# Allegro board Sport Sign_Indicator_PCB.brd
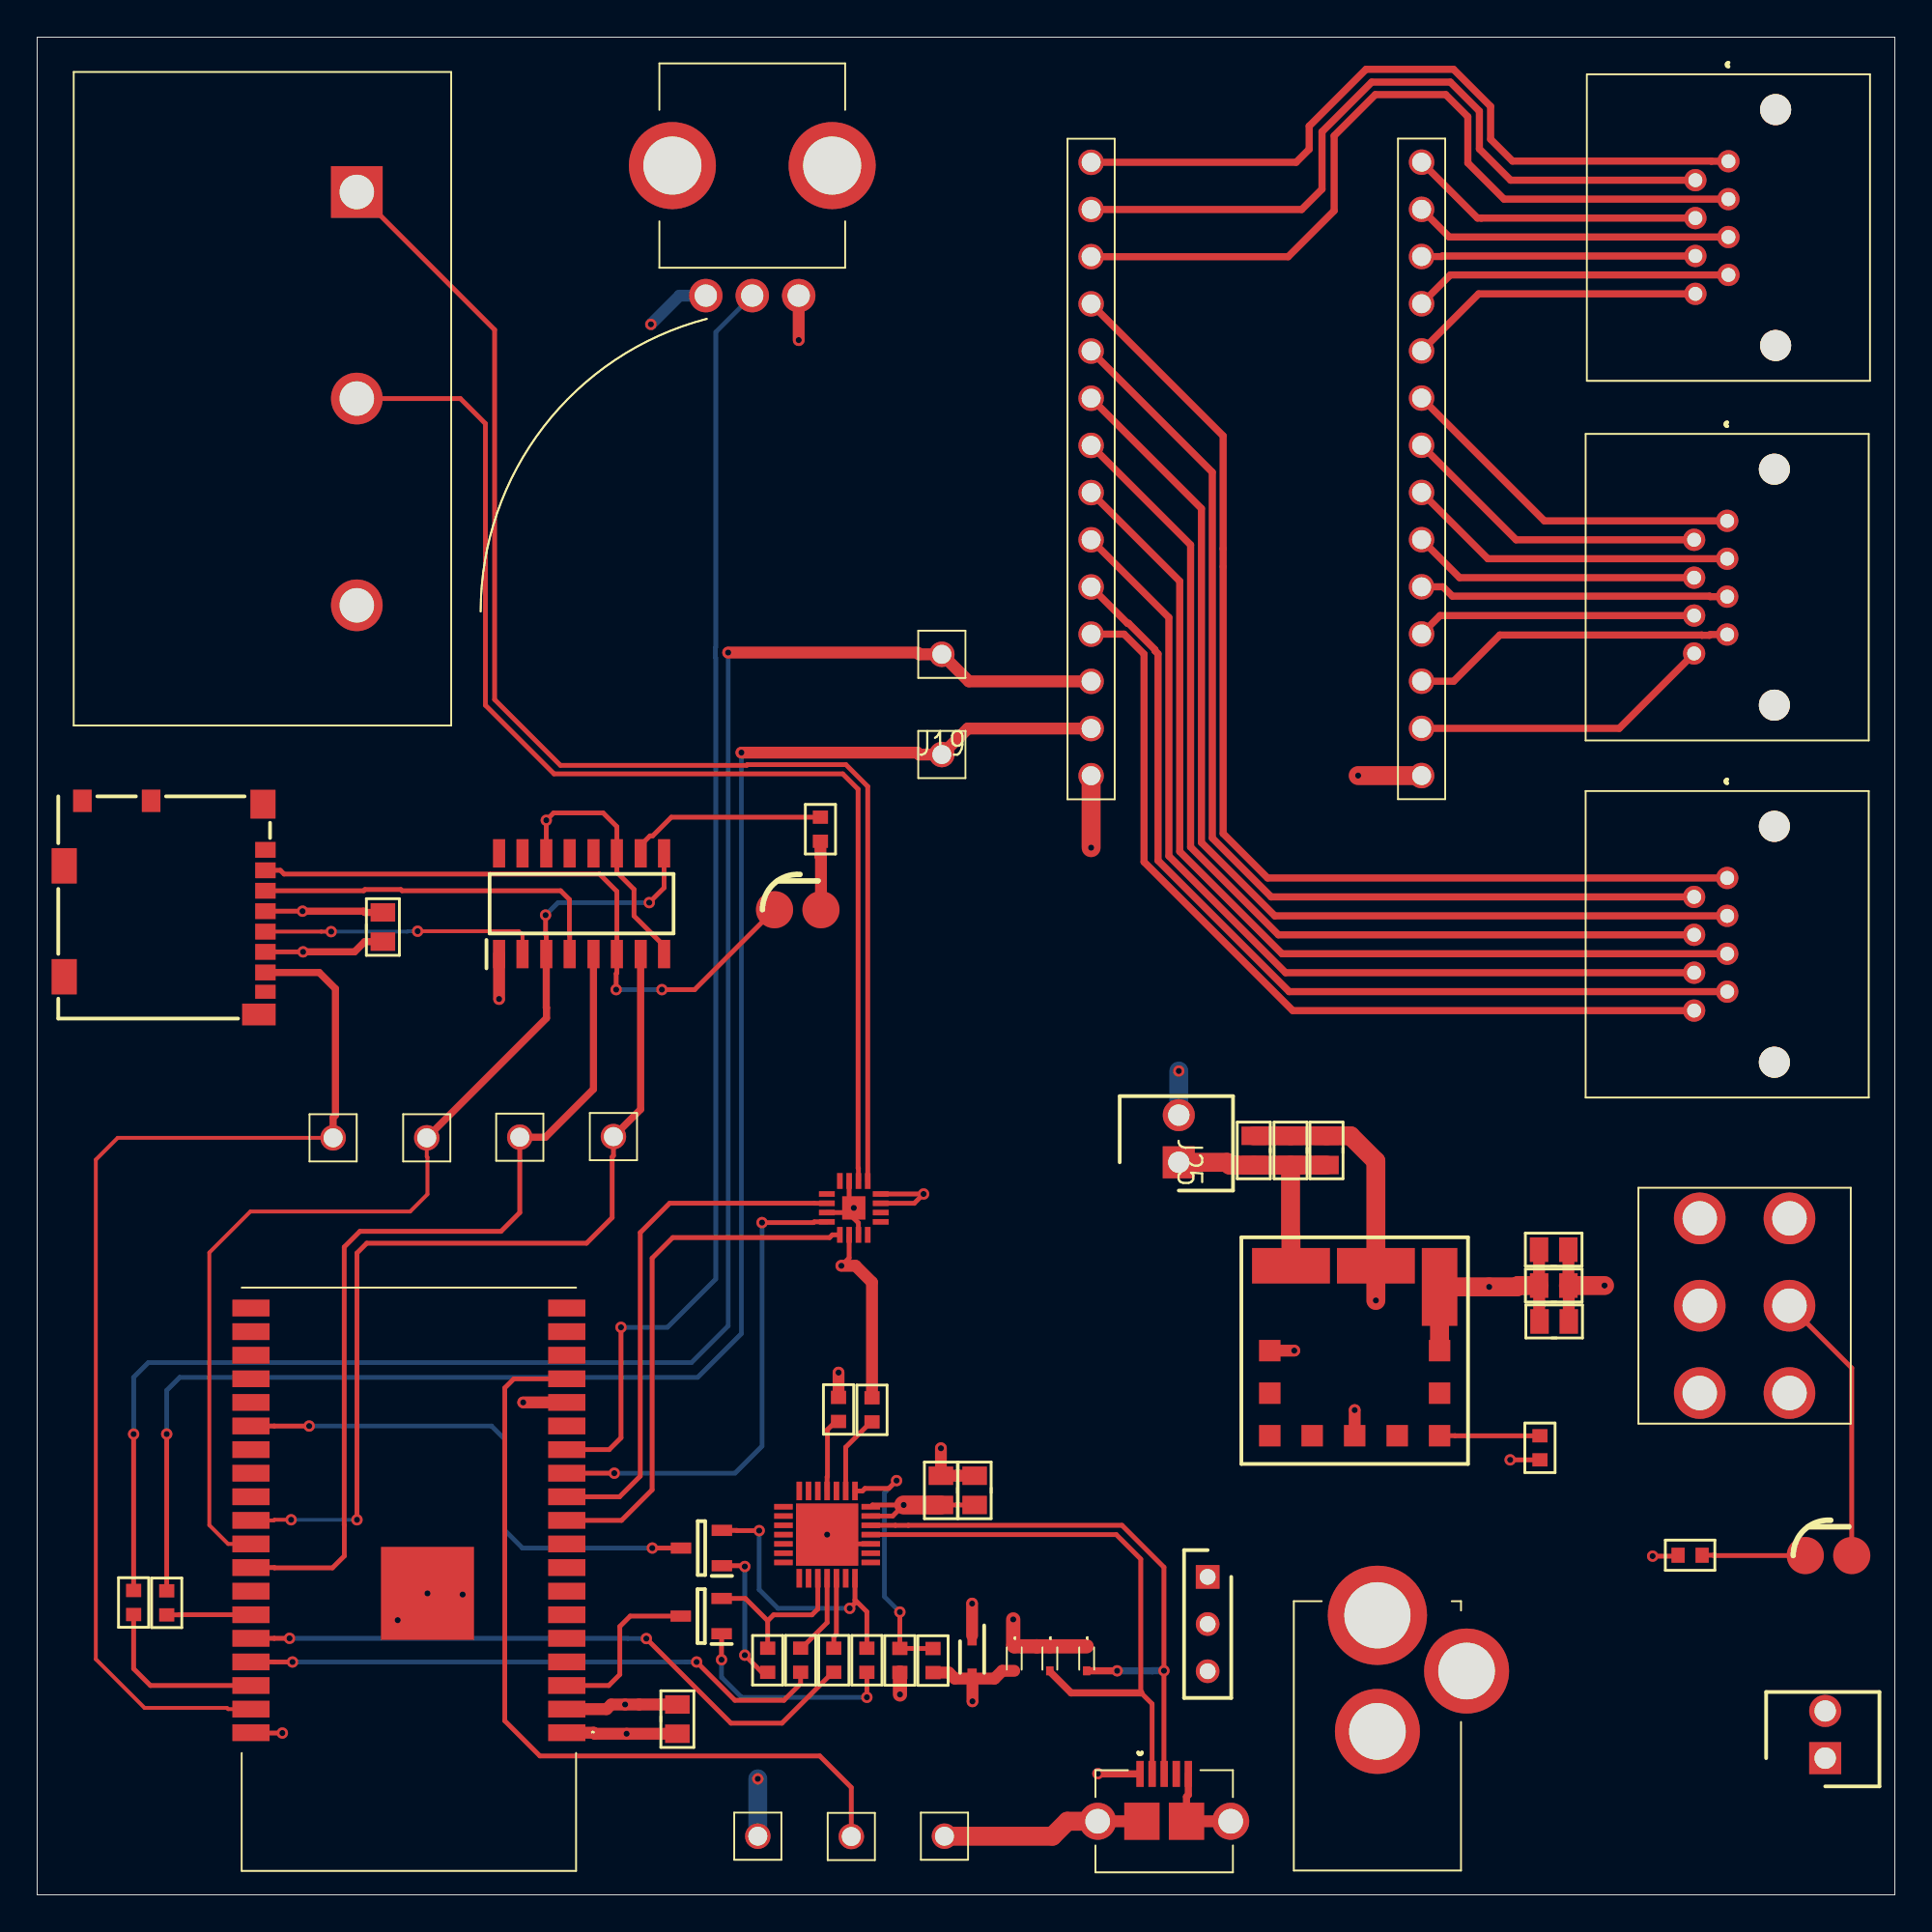
[diagram p0: board, top side]
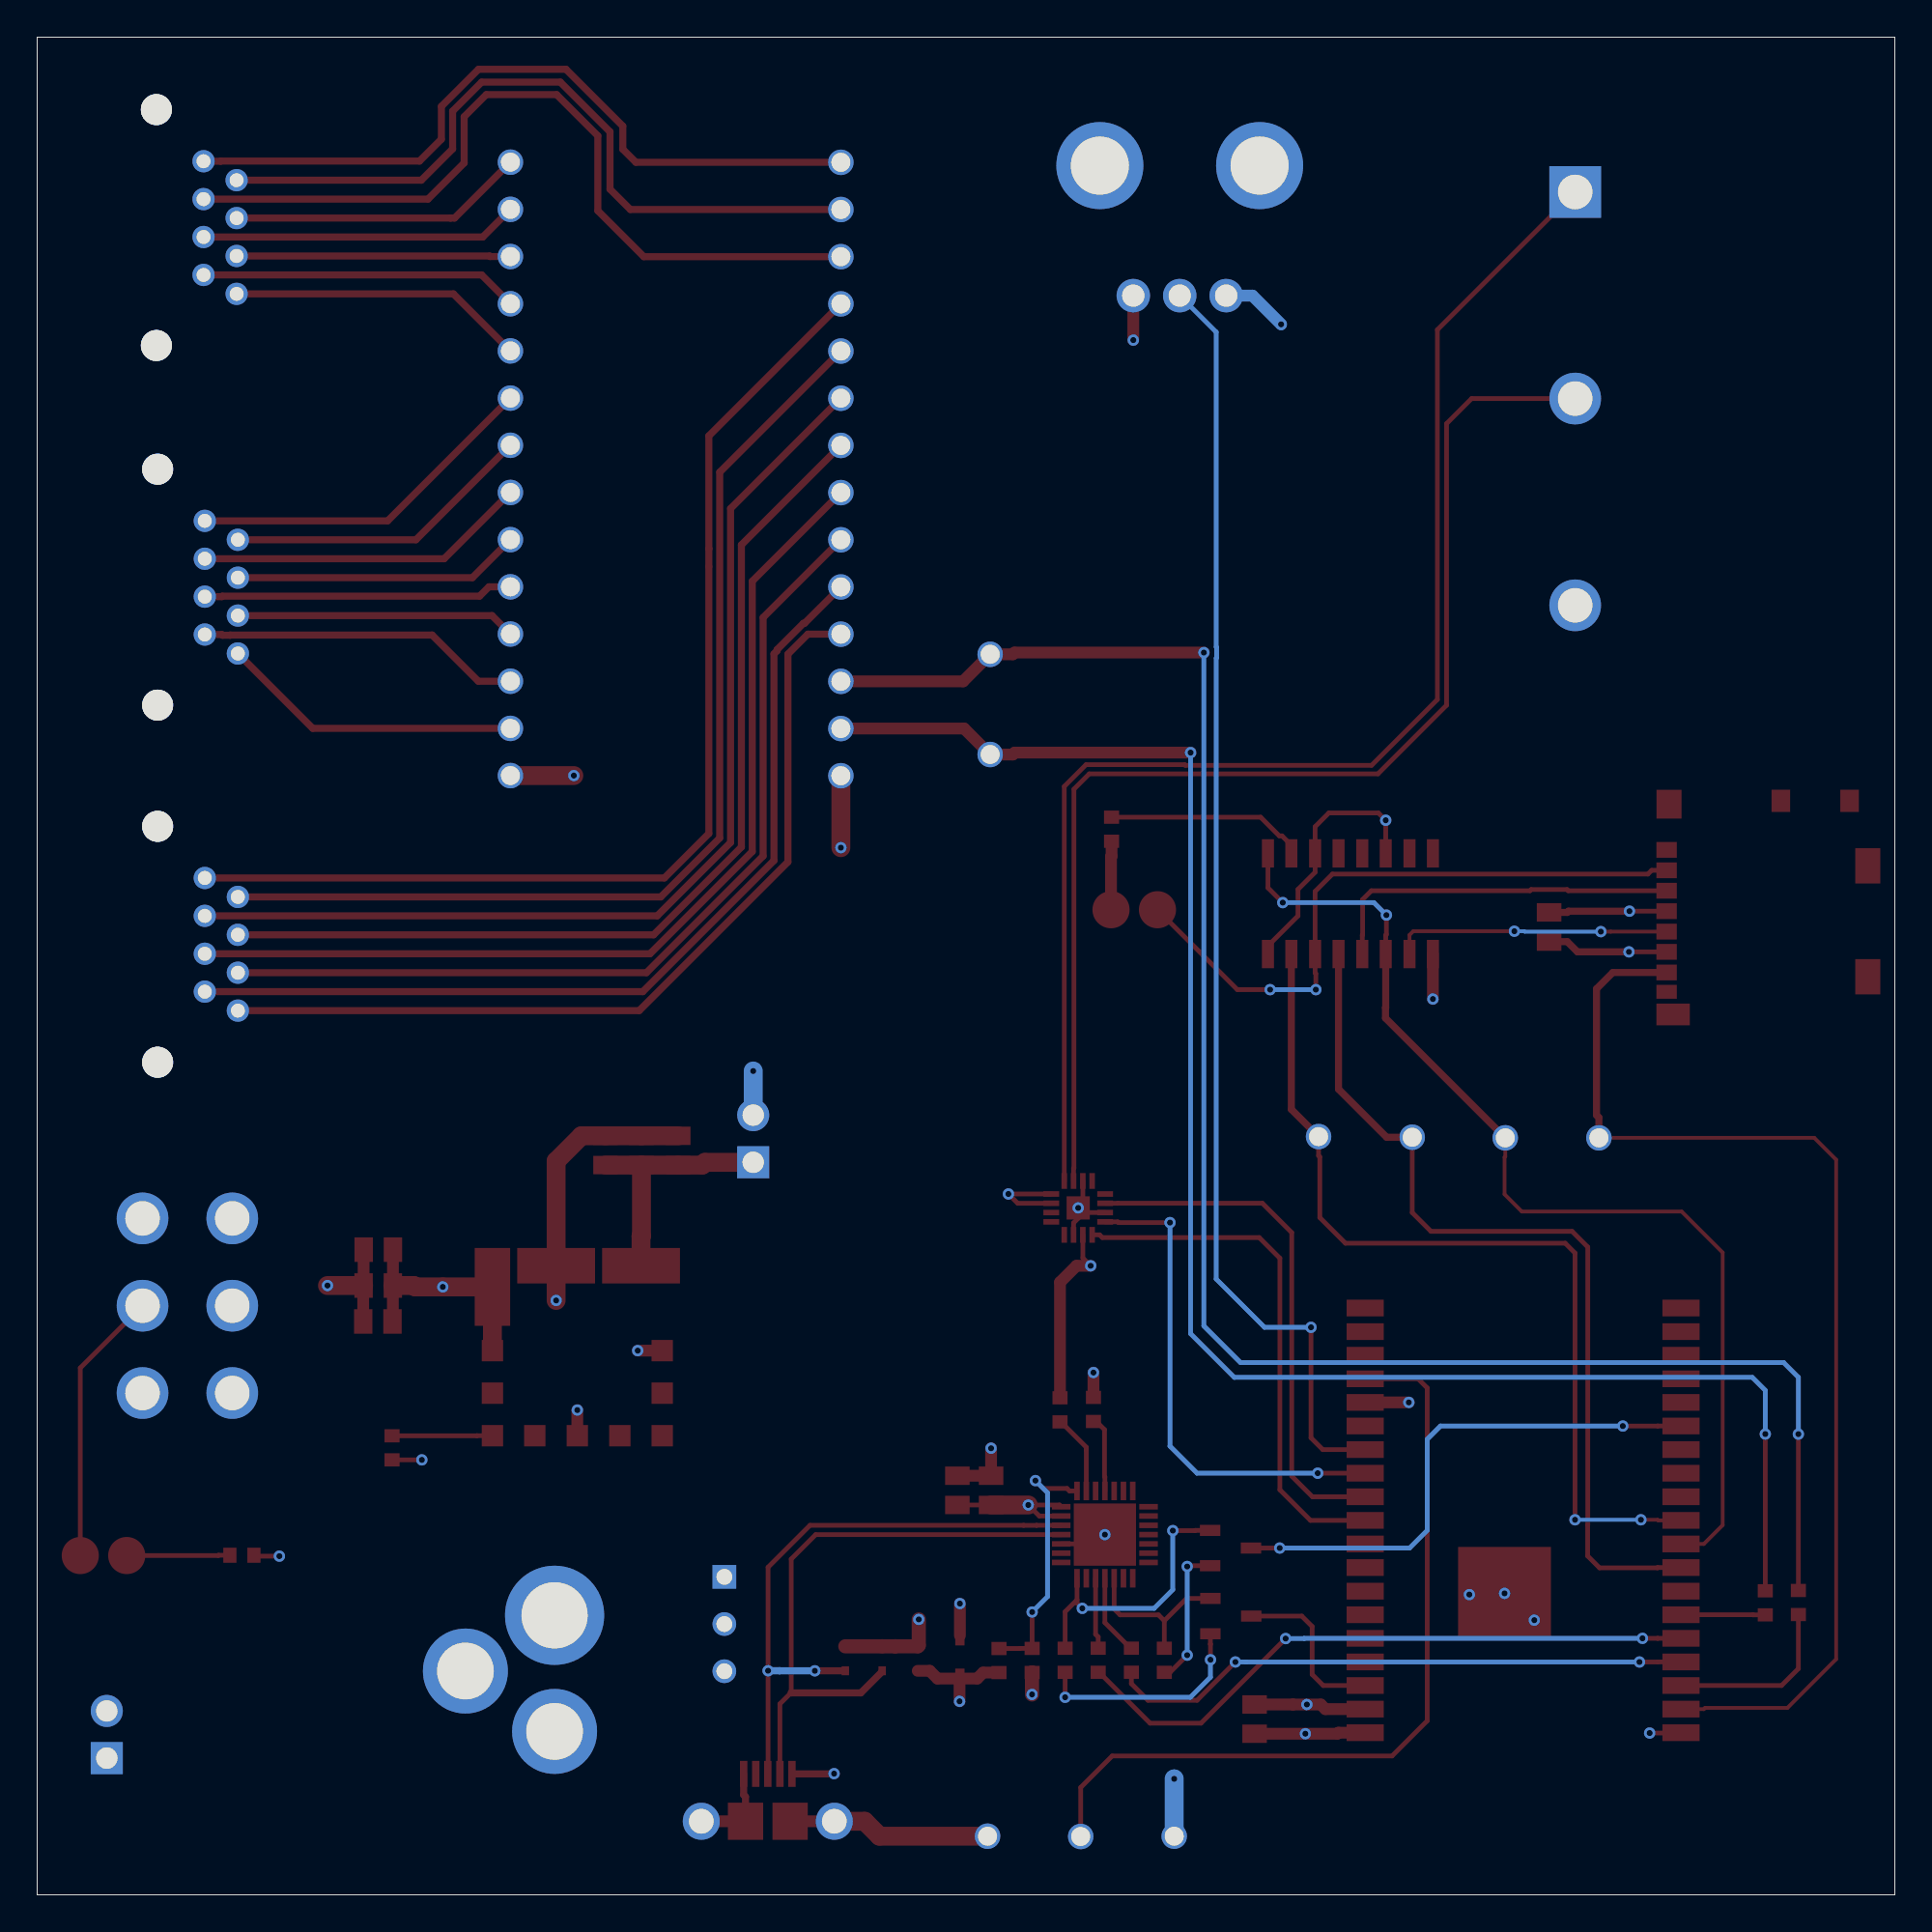
[diagram p1: board, bottom side, seen from below]

Outline 100 x 100 mm; copper layers: TOP, GND_PLANE, POWER_PLANE, BOTTOM. Coordinates in mm from the lower left corner of the outline.
Outline path: 0,100 0,0 100,0 100,100 0,100

## Placement (name value [footprint] x y rotation side)
C2  100u  [0805_030]  34.46 9.46 90 top
C4  0.1u  [0805_030]  50.46 21.77 270 top
C5  4.7u  [0805_030]  48.65 21.77 270 top
C6  0.1u  [0805_030]  18.61 52.1 90 top
C10  10u  [0805_030]  67.47 40.07 270 top
C11  10u  [0805_030]  65.49 40.07 270 top
C12  10u  [0805_030]  69.41 40.07 270 top
C13  10u  [0805_030]  81.64 34.73 180 top
C14  10u  [0805_030]  81.64 32.8 180 top
C15  22u  [0805_030]  81.66 30.86 180 top
D4  BAT760_7  [SOD2513X120N]  50.33 12.8 270 top
D5  LESD5D5_0CT1G  [LESD5D50CT1G]  52.6 12.72 270 top
D6  LESD5D5_0CT1G  [LESD5D50CT1G]  54.51 12.72 270 top
D7  LESD5D5_0CT1G  [LESD5D50CT1G]  56.5 12.72 270 top
IC4  CP2102  [QFN50P500X500X100-29N-D]  42.52 19.39 180 top
IC5  ESP32_WROVER  [ESP32WROVER]  20.01 16.99 180 top
IC6  CD74HC4050M96  [SOIC127P600X175-16N]  29.31 53.35 90 top
IC8  MAX98357AETE_T  [QFN50P300X300X80-17N]  43.96 36.98 90 top
J1  USB3090_30_A  [USB309030A]  59.37 6.51 0 top
J4  1_406525_1  [14065251]  90.98 73.96 90 top
J5  1_406525_1  [14065251]  90.98 54.74 90 top
J6  1_406525_1  [14065251]  91.04 93.32 90 top
J7  TSW_114_07_T_S  [TSW-114-XX-YY-S]  74.52 60.25 90 top
J8  TSW_114_07_T_S  [TSW-114-XX-YY-S]  56.74 93.26 270 top
J9  104031_0811  [1040310811]  12.54 53.15 90 top
J11  8PCV_03_006  [8PCV03006]  17.21 91.67 270 top
J12  -  [RAPC732X]  76.95 12.05 0 top
J14  M20_9990345  [HDRV3W64P0X254_1X3_762X254X864P]  63.01 17.12 270 top
J15  640456_2  [SHDR2W66P0X254_1X2]  96.25 7.36 270 top
J16  TP  [TSW-101-XX-YY-S]  31.02 40.82 0 top
J17  TP  [TSW-101-XX-YY-S]  20.97 40.75 0 top
J18  TP  [TSW-101-XX-YY-S]  25.98 40.78 0 top
J19  TP  [TSW-101-XX-YY-S]  48.7 61.38 0 top
J20  TP  [TSW-101-XX-YY-S]  15.93 40.75 0 top
J21  TP  [TSW-101-XX-YY-S]  48.7 66.78 0 top
J22  TP  [TSW-101-XX-YY-S]  38.79 3.16 0 top
J23  TP  [TSW-101-XX-YY-S]  43.83 3.14 0 top
J24  TP  [TSW-101-XX-YY-S]  48.84 3.16 0 top
J25  640456_2  [SHDR2W66P0X254_1X2]  61.45 39.43 270 top
LED1  GREEN  [SLR-343X_SLR343X]  95.18 18.26 180 top
LED3  RED  [SLR-343X_SLR343X]  39.69 53.03 180 top
NOREF  -  []  0 100 0 top
NOREF#2  -  []  100 0 90 top
NOREF#3  -  []  56.74 93.26 0 top
Q1  SS8050_G  [SOT95P240X115-3N]  35.76 18.67 180 top
Q2  SS8050_G  [SOT95P240X115-3N]  35.75 15.01 180 top
R1  1k  [0603_039]  88.98 18.28 0 top
R2  10K  [0603_039]  44.66 12.63 90 top
R3  10K  [0603_039]  39.32 12.63 270 top
R4  0  [0603_039]  42.88 12.63 270 top
R6  0ohm  [0603_039]  6.97 15.72 90 top
R7  0ohm  [0603_039]  5.19 15.74 90 top
R9  0  [0603_039]  41.1 12.63 270 top
R10  22.1K  [0603_039]  48.22 12.61 90 top
R11  47.5K  [0603_039]  46.44 12.62 90 top
R12  10K (NC)  [0603_039]  43.14 26.13 270 top
R13  2K  [0603_039]  44.94 26.11 270 top
R14  1k  [0603_039]  42.16 57.36 90 top
R15  444  [0603_039]  80.9 24.06 270 top
S2  -  [AE211MD1CB04]  94.33 27.01 90 top
U1  OKL_T_6_W5N_C  [OKL-T3-W12]  70.92 29.3 0 top
VR2  PTV09A_4015F_B103  [PTV09A4015FB103]  35.99 86.09 0 top

## Library data of the parts
C2 C4-C6 C10-C15 = C
D4 = BAT760_7
D5-D7 = LESD5D5_0CT1G
IC4 = CP2102
IC5 = ESP32_WROVER
IC6 = CD74HC4050M96
IC8 = MAX98357AETE_T
J1 = USB3090_30_A
J4-J6 = 1_406525_1
J7 J8 = TSW_114_07_T_S
J9 = 104031_0811
J11 = 8PCV_03_006
J12 = RAPC732X
J14 = M20_9990345
J15 J25 = 640456_2
J16-J24 = TSW_101_15_T_S
LED1 LED3 = SLI_343P8G3F
Q1 Q2 = SS8050_G
R1-R4 R6 R7 R9-R15 = R
S2 = AE211MD1CB04
U1 = OKL_T_3_W12N_C
VR2 = PTV09A_4015F_B103

## Footprints (pads in the part's own frame, mm; a bottom-side part is the same pattern mirrored in y, then rotated)
8PCV03006
  rect 2.781x2.781 hole 1.854: 1(0,0)
  round 2.781 hole 1.854: 2(11.12,0) 3(22.25,0)
0603_039
  rect 0.711x0.813 smd: 1(-0.648,0) 2(0.648,0)
0805_030
  rect 0.991x1.321 smd: 1(-0.787,0) 2(0.787,0)
14065251
  round 1.2 hole 0.75: 1(0,0) 2(-1.02,1.78) 3(-2.04,0) 4(-3.06,1.78) 5(-4.08,0) 6(-5.1,1.78) 7(-6.12,0) 8(-7.14,1.78)
  round 1.665 hole 3.33: 9(-9.92,-2.54) 10(2.78,-2.54)
1040310811
  rect 0.85x1.1 smd: 1(3.1,0.25) 2(2,0.25) 3(0.9,0.25) 4(-0.2,0.25) 5(-1.3,0.25) 6(-2.39,0.25) 7(-3.5,0.25)
  rect 0.75x1.1 smd: 8(-4.54,0.25)
  rect 1.17x1.8 smd: 9(-5.76,0.6)
  rect 1.9x1.35 smd: 10(-3.73,11.08) 11(2.24,11.08)
  rect 1.2x1 smd: 12(5.74,10.1) 13(5.74,6.4)
  rect 1.55x1.35 smd: 14(5.56,0.38)
AE211MD1CB04
  round 2.781 hole 1.854: 1(0,0) 2(4.7,0) 3(9.4,0) 4(0,4.83) 5(4.7,4.83) 6(9.4,4.83)
ESP32WROVER
  rect 2x0.9 smd: 1(-8.5,8.26) 2(-8.5,6.99) 3(-8.5,5.72) 4(-8.5,4.45) 5(-8.5,3.18) 6(-8.5,1.91) 7(-8.5,0.64) 8(-8.5,-0.63) 9(-8.5,-1.9) 10(-8.5,-3.17) 11(-8.5,-4.44) 12(-8.5,-5.71) 13(-8.5,-6.98) 14(-8.5,-8.25) 15(-8.5,-9.52) 16(-8.5,-10.79) 17(-8.5,-12.06) 18(-8.5,-13.33) 19(-8.5,-14.6) 20(8.5,-14.6) 21(8.5,-13.33) 22(8.5,-12.06) 23(8.5,-10.79) 24(8.5,-9.52) 25(8.5,-8.25) 26(8.5,-6.98) 27(8.5,-5.71) 28(8.5,-4.44) 29(8.5,-3.17) 30(8.5,-1.9) 31(8.5,-0.63) 32(8.5,0.64) 33(8.5,1.91) 34(8.5,3.18) 35(8.5,4.45) 36(8.5,5.72) 37(8.5,6.99) 38(8.5,8.26)
  rect 5x5 smd: 39(-1,0.76)
HDRV3W64P0X254_1X3_762X254X864P
  rect 1.275x1.275 hole 0.85: 1(0,0)
  round 1.275 hole 0.85: 2(2.54,0) 3(5.08,0)
LESD5D50CT1G
  rect 0.48x0.4 smd: 1(-0.66,0) 2(0.66,0)
OKL-T3-W12
  rect 1.15x1.15 smd: 1(-4.57,0) 5(4.57,0) 6(4.57,-4.58) 7(0,-4.58) 8(-2.29,-4.58) 9(-4.57,-4.58) 10(-4.57,-2.29) 11(4.57,-2.29) 12(2.29,-4.58)
  rect 4.19x1.91 smd: 2(-3.43,4.57) 3(1.14,4.57)
  rect 1.91x4.19 smd: 4(4.57,3.43)
PTV09A4015FB103
  round 1.8 hole 1.2: 1(0,0) 2(2.5,0) 3(5,0)
  round 4.686 hole 3.124: MH1(-1.8,7) MH2(6.8,7)
QFN50P300X300X80-17N
  rect 0.85x0.3 smd: 1(-1.45,0.75) 2(-1.45,0.25) 3(-1.45,-0.25) 4(-1.45,-0.75) 9(1.45,-0.75) 10(1.45,-0.25) 11(1.45,0.25) 12(1.45,0.75)
  rect 0.3x0.85 smd: 5(-0.75,-1.45) 6(-0.25,-1.45) 7(0.25,-1.45) 8(0.75,-1.45) 13(0.75,1.45) 14(0.25,1.45) 15(-0.25,1.45) 16(-0.75,1.45)
  rect 1.25x1.25 smd: 17(0,0)
QFN50P500X500X100-29N-D
  rect 1x0.3 smd: 1(-2.35,1.5) 2(-2.35,1) 3(-2.35,0.5) 4(-2.35,0) 5(-2.35,-0.5) 6(-2.35,-1) 7(-2.35,-1.5) 15(2.35,-1.5) 16(2.35,-1) 17(2.35,-0.5) 18(2.35,0) 19(2.35,0.5) 20(2.35,1) 21(2.35,1.5)
  rect 0.3x1 smd: 8(-1.5,-2.35) 9(-1,-2.35) 10(-0.5,-2.35) 11(0,-2.35) 12(0.5,-2.35) 13(1,-2.35) 14(1.5,-2.35) 22(1.5,2.35) 23(1,2.35) 24(0.5,2.35) 25(0,2.35) 26(-0.5,2.35) 27(-1,2.35) 28(-1.5,2.35)
  rect 3.35x3.35 smd: 29(0,0)
RAPC732X
  round 4.575 hole 3.05: 1(0,0) 2(-4.8,-3.25)
  round 5.34 hole 3.56: 3(-4.8,3)
SHDR2W66P0X254_1X2
  rect 1.725x1.725 hole 1.15: 1(0,0)
  round 1.725 hole 1.15: 2(-2.54,0)
SLR-343X_SLR343X
  round 2 smd: 1(0,0) 2(-2.5,0)
SOD2513X120N
  rect 1.075x0.5 smd: 1(-1.16,0) 2(1.16,0)
SOIC127P600X175-16N
  rect 1.525x0.65 smd: 1(-2.71,4.44) 2(-2.71,3.18) 3(-2.71,1.9) 4(-2.71,0.64) 5(-2.71,-0.64) 6(-2.71,-1.9) 7(-2.71,-3.18) 8(-2.71,-4.44) 9(2.71,-4.44) 10(2.71,-3.18) 11(2.71,-1.9) 12(2.71,-0.64) 13(2.71,0.64) 14(2.71,1.9) 15(2.71,3.18) 16(2.71,4.44)
SOT95P240X115-3N
  rect 1.1x0.6 smd: 1(-1.1,0.95) 2(-1.1,-0.95) 3(1.1,0)
TSW-101-XX-YY-S
  round 1.372 hole 1.02: 1(0,0)
TSW-114-XX-YY-S
  round 1.372 hole 1.02: 1(0,0) 2(2.54,0) 3(5.08,0) 4(7.62,0) 5(10.16,0) 6(12.7,0) 7(15.24,0) 8(17.78,0) 9(20.32,0) 10(22.86,0) 11(25.4,0) 12(27.94,0) 13(30.48,0) 14(33.02,0)
USB309030A
  rect 0.4x1.4 smd: 1(0,0) 2(0.65,0) 3(1.3,0) 4(1.95,0) 5(2.6,0)
  rect 1.9x2 smd: 6(0.1,-2.55) 7(2.5,-2.55)
  round 1.993 hole 1.328: 8(-2.28,-2.55) 9(4.88,-2.55)

## Nets
5VDD: J14.2 S2.1(NO_1) S2.4(NO_2)
5VIN: J12.3 J14.3
GND_POWER: C2.1 C4.1 C5.1 C6.1 C10.1 C11.1 C12.1 C13.1 C14.1 C15.1 D5.1 D6.1 D7.1 IC4.3(GND) IC4.29(EPAD) IC5.1(GND_1) IC5.15(GND_2) IC5.38(GND_3) IC5.39(GND_4) IC6.8(GND) IC6.11(5A) IC6.14(6A) IC8.3(GND_1) IC8.11(GND_2) IC8.15(GND_3) IC8.17(THERMAL_PAD) J1.5 J1.6 J1.7 J1.8 J1.9 J7.1 J9.6(VSS) J12.1 J12.2 J15.1 J24.1 R1.1 R11.1 R12.1 R15.2 U1.1(ON_OFF) U1.3(GND_1) U1.7(GND_2) VR2.3 VR2.MH1 VR2.MH2
VBUS: D4.2(A) D5.2 J1.1 R10.1
#EN: IC5.3(EN) Q2.3(C)
ACTIVE: IC4.11(S\U\S\P\E\N\D\) R12.2
BCLK: IC5.12(IO27) IC8.16(BCLK)
CHIP_SELECT: IC6.6(3Y) J9.2(CD_DAT3) LED3.1(K)
CLK: IC5.20(CLK)
CMD: IC5.19(CMD)
COM0: J4.8 J7.2
COM1: J4.7 J7.3
COM2: J4.6 J7.4
COM3: J4.5 J7.5
COM4: J4.4 J7.6
COM5: J4.3 J7.7
COM6: J4.2 J7.8
COM7: J4.1 J7.9
CS: IC5.29(IO5) IC6.7(3A) J16.1
CTS: IC4.23(CTS)
D+: D6.2 IC4.4(DP) J1.2
D-: D7.2 IC4.5(DN) J1.3
DATA_IN: IC6.4(2Y) J9.3(CMD)
DCD: IC4.1(DCD)
DI: IC5.31(IO19) IC6.5(2A) J18.1
DIN: IC5.10(IO25) IC8.1(DIN)
DO: IC5.37(IO23) J9.7(DAT0) J20.1
DSR: IC4.27(DSR)
DTR: IC4.28(DTR) Q1.2(E) R2.2
EXT_3V3: C2.2 C4.2 C5.2 C6.2 C13.2 C14.2 C15.2 IC4.6(VDD) IC4.7(REGIN) IC5.2(VDD33) IC8.2(GAIN_SLOT) J9.4(VDD) J22.1 R13.1 U1.4(VOUT1) U1.5(SENSE) VR2.1
EXT_5V: IC6.1(VCC) IC8.7(VDD_1) IC8.8(VDD_2) J8.14 J15.2 J25.2 S2.5(COM_2)
INT_GOAL: IC5.16(IO13) J23.1
IO0: IC5.25(IO0) Q1.3(C)
IO2: IC5.24(IO2)
IO4: IC5.26(IO4)
IO12: IC5.14(IO12)
IO15: IC5.23(IO15)
IO32: IC5.8(IO32)
IO33: IC5.9(IO33)
IO34: IC5.6(IO34)
IO35: IC5.7(IO35)
LRCLK: IC5.11(IO26) IC8.14(LRCLK)
RI: IC4.2(RI)
ROW0: J5.8 J8.11
ROW1: J5.7 J8.10
ROW2: J5.6 J8.9
ROW3: J5.5 J8.8
ROW4: J5.4 J8.7
ROW5: J5.3 J8.6
ROW6: J5.2 J8.5
ROW7: J5.1 J8.4
ROW8: J6.3 J8.3
ROW9: J6.2 J8.2
ROW10: J6.1 J8.1
ROW11: J6.4 J7.14
ROW12: J6.5 J7.13
ROW13: J6.6 J7.12
ROW14: J6.7 J7.11
ROW15: J6.8 J7.10
RTS: IC4.24(RTS) Q2.2(E) R3.1
RXD: IC4.25(RXD) R9.1
SCK: J8.12 J21.1 R7.2
SCLK: IC5.30(IO18) IC6.3(1A) IC6.9(4A) J17.1
SCLK_IN: IC6.2(1Y) J9.5(CLK)
SD0: IC5.21(SD0)
SD1: IC5.22(SD1)
SD2: IC5.17(SD2)
SD3: IC5.18(SD3)
SDA: J8.13 J19.1 R6.2
SVN: IC5.5(SENSOR_VN)
SVP: IC5.4(SENSOR_VP)
TXD: IC4.26(TXD) R4.1
U0RX: IC5.34(RXD0) R4.2
U0TX: IC5.35(TXD0) R9.2
VOL: IC5.13(IO14) VR2.2
VUSB: D4.1(K) J14.1
N07794: IC5.27(NC_1)
N07798: IC5.28(NC_2)
N07814: IC5.32(NC_3)
N07818: IC5.33(IO21) R6.1
N07830: IC5.36(IO22) R7.1
N33314: LED1.2(A) S2.2(COM_1)
N35850: IC4.8(VBUS) R10.2 R11.2
N37546: IC4.9(R\S\T\) R13.2
N43223: IC6.10(4Y) R14.2
N45229: IC8.10(OUTN) J11.2
N45231: IC8.9(OUTP) J11.1
N47844: Q1.1(B) R3.2
N51590: C10.2 C11.2 C12.2 J25.1 U1.2(VIN)
N288090: LED1.1(K) R1.2
N359501: Q2.1(B) R2.1
N425301: LED3.2(A) R14.1
N520181: R15.1 U1.6(TRIM1)

Pads without a net: IC4 10 12 13 14 15 16 17 18 19 20 21 22; IC6 12 13 15 16; IC8 4 5 6 12 13; J1 4; J4 9 10; J5 9 10; J6 9 10; J9 1 8 9 10 11 12 13 14; J11 3; S2 3 6; U1 8 9 10 11 12

## Via types
v1: diameter 0.61, hole 0.33, TOP to BOTTOM, 67 vias

## Routing (per net, layer and track width the routed paths; a pad name or vN(x,y) marks a point on that pad's centre or on a via; arc(x,y) is an arc through that point)
5VDD: length 15.8
  POWER_PLANE w0.203: 89.5,25.44 S2.4 ; S2.4 89.5,28.58 ; S2.4 91.07,27.01 ; S2.4 87.93,27.01 ; J14.2 63.82,14.58 ; J14.2 63.01,13.76 ; J14.2 63.01,15.39 ; J14.2 62.19,14.58 ; 92.76,27.01 S2.1 ; S2.1 94.33,25.44 ; S2.1 95.9,27.01 ; S2.1 94.33,28.58
5VIN: length 14.7
  POWER_PLANE w0.203: J14.3 63.82,12.04 ; J14.3 63.01,11.22 ; J14.3 62.19,12.04 ; J14.3 63.01,12.85 ; J12.3 72.15,17.9 ; J12.3 72.15,12.2 ; J12.3 69.3,15.05 ; J12.3 75,15.05
GND_POWER: length 167.5
  TOP w0.254: v1(42.52,19.39) 43.02,18.89 IC4.3 ; IC6.14 v1(27.41,57.84) 27.8,58.24 30.47,58.24 31.21,57.5 IC6.11 31.21,55.05 32.13,54.12 32.13,52.7 33.75,51.08 IC6.8 ; J9.6 v1(14.31,50.76) ; v1(13.2,8.71) 11.53,8.71 IC5.38 ; R15.2 v1(79.29,23.41) ; v1(43.96,36.98) 43.71,37.23 IC8.11 ; v1(43.96,36.98) 43.96,36.42 44.21,36.17 IC8.3 ; v1(43.96,36.98) 43.71,36.73 IC8.15 ; v1(86.96,18.23) 88.28,18.23 R1.1
  TOP w0.381: v1(14.31,50.76) 17.08,50.76 17.63,51.31 C6.1 ; J1.5 61.97,5.38 61.87,5.28 J1.7
  TOP w0.635: C13.1 82.43,34.73 C14.1 82.45,32.78 C15.1 ; v1(48.65,24.04) C5.1 C4.1 ; J1.7 J1.9 ; U1.7 v1(70.92,26.09) ; C2.1 v1(31.73,8.67) 30.01,8.67 29.96,8.73 IC5.1 ; J1.6 J1.8 ; IC5.15 v1(26.16,26.51) ; U1.1 v1(67.67,29.3) ; R12.1 v1(43.14,28.11) ; VR2.3 v1(40.99,83.69)
  TOP w0.762: D7.1 D6.1 53.8,13.38 D5.1 52.54,13.43 v1(52.54,14.83) ; R11.1 46.45,11.96 v1(46.45,10.79)
  TOP w1.016: v1(72.06,32) U1.3 72.06,39.5 70.7,40.86 C12.1 C10.1 C11.1 ; J1.8 55.46,3.96 54.65,3.16 J24.1 ; C14.1 v1(84.37,32.8) ; J7.1 v1(71.11,60.25)
  GND_PLANE w0.203: 39.92,86.09 VR2.3 ; VR2.3 40.99,87.16 ; VR2.3 40.99,85.01 ; VR2.3 42.07,86.09 ; 34.19,90.56 VR2.MH1 ; VR2.MH1 34.19,95.61 ; VR2.MH1 31.67,93.09 ; VR2.MH1 36.72,93.09 ; J1.8 57.09,5.14 ; J1.8 58.26,3.96 ; J1.8 57.09,2.79 ; J1.8 55.91,3.96 ; J12.1 79.41,12.05 ; J12.1 76.95,14.51 ; J12.1 74.48,12.05 ; J12.1 76.95,9.58 ; 72.15,6.33 J12.2 ; J12.2 69.68,8.8 ; J12.2 72.15,11.26 ; J12.2 74.61,8.8 ; 96.25,6.32 J15.1 ; J15.1 96.25,8.4 ; J15.1 97.29,7.36 ; J15.1 95.21,7.36 ; J1.9 65.42,3.96 ; J1.9 63.07,3.96 ; J1.9 64.25,5.14 ; J1.9 64.25,2.79 ; 40.27,93.09 VR2.MH2 ; VR2.MH2 42.79,95.61 ; VR2.MH2 42.79,90.56 ; VR2.MH2 45.32,93.09 ; J24.1 49.7,3.16 ; J24.1 48.84,4.02 ; J24.1 48.84,2.29 ; J24.1 47.98,3.16 ; J7.1 74.52,61.11 ; J7.1 75.39,60.25 ; J7.1 74.52,59.39 ; J7.1 73.66,60.25
  GND_PLANE w0.254: 62.01,6.13 61.42,6.13 ; 59.68,12.16 59.58,12.06
  GND_PLANE w0.381: 52.53,14.61 52.53,13.5 ; v1(31.73,8.67) 28.65,8.67 ; 52.5,14.51 52.5,13.47
  vias: v1(19.41,14.79) v1(21.01,16.23) v1(22.9,16.16)
VBUS: length 8.2
  TOP w0.381: v1(57.1,6.52) 57.12,6.51 J1.1
  TOP w0.635: R10.1 49.08,11.96 49.4,11.64 D4.2 ; D4.2 50.35,11.62 v1(50.35,10.42) ; D4.2 51.54,11.64 51.95,12.06 D5.2
#EN: length 9.2
  TOP w0.254: Q2.3 31.92,15.01 31.37,14.45 31.37,11.86 30.77,11.27 IC5.3
ACTIVE: length 4.1
  TOP w0.254: R12.2 42.98,25.48 42.54,25.04 42.54,22.52 42.52,22.5 IC4.11
BCLK: length 26.7
  TOP w0.254: v1(39.02,36.19) 41.79,36.19 41.83,36.23 IC8.16 ; IC5.12 v1(31.07,22.7)
  BOTTOM w0.254: v1(39.02,36.19) 39.02,24.16 37.56,22.7 v1(31.07,22.7)
CHIP_SELECT: length 35
  TOP w0.254: J9.2 13.09,55.15 13.29,54.95 30.27,54.95 31.21,54.01 IC6.6 31.21,49.63 31.17,49.59 v1(31.17,48.73) ; v1(33.63,48.73) 35.39,48.73 LED3.1
  BOTTOM w0.254: v1(33.63,48.73) v1(31.17,48.73)
COM0: length 16.3
  TOP w0.381: J7.2 85.16,62.79 J4.8
COM1: length 17.5
  TOP w0.381: J7.3 76.25,65.33 78.74,67.82 89.61,67.82 89.62,67.8 90.02,67.8 90.06,67.84 J4.7
COM2: length 15.1
  TOP w0.381: J7.4 75.52,68.86 J4.6
COM3: length 16.7
  TOP w0.381: J4.5 90.06,69.88 90.03,69.91 76.18,69.91 75.68,70.41 J7.5
COM4: length 15.5
  TOP w0.381: J4.4 76.57,70.9 J7.6
COM5: length 17.9
  TOP w0.381: J4.3 78.09,71.92 J7.7
COM6: length 16.8
  TOP w0.381: J4.2 79.61,72.94 J7.8
COM7: length 19.2
  TOP w0.381: J4.1 81.13,73.96 J7.9
CS: length 49.4
  TOP w0.203: IC5.29 12.74,20.16 12.77,20.19 v1(13.67,20.19)
  TOP w0.254: J16.1 31.02,39.79 30.95,39.72 30.95,36.46 29.58,35.08 17.75,35.08 17.22,34.55 v1(17.22,20.19)
  TOP w0.381: J16.1 32.49,42.28 IC6.7
  BOTTOM w0.203: v1(17.22,20.19) v1(13.67,20.19)
D+: length 32.3
  TOP w0.254: IC4.4 58.09,19.39 59.41,18.07 59.41,10.89 60.02,10.28 J1.2
  TOP w0.381: 59.41,10.89 59.39,10.87 55.66,10.87 54.51,12.02 D6.2
D-: length 32
  TOP w0.254: J1.3 60.65,6.52 v1(60.65,12.06) 60.65,17.63 58.4,19.89 46.9,19.89 46.89,19.89 46.2,19.89 46.2,19.89 IC4.5
  TOP w0.381: D7.2 v1(58.14,12.06)
  BOTTOM w0.381: v1(60.65,12.06) 60.03,12.06 60.03,12.06 v1(58.14,12.06)
DATA_IN: length 19.6
  TOP w0.254: IC6.4 28.67,51.66 28.65,51.68 28.65,53.58 28.18,54.05 19.64,54.05 19.58,54.12 17.65,54.12 17.58,54.05 J9.3
DI: length 48.5
  TOP w0.254: J18.1 25.98,36.73 24.97,35.72 17.38,35.72 16.53,34.87 16.53,19.91 16.54,19.9 16.54,18.24 15.9,17.6 12.78,17.6 12.77,17.62 IC5.31
  TOP w0.381: J18.1 27.36,40.78 29.95,43.37 IC6.5
DIN: length 28.4
  TOP w0.254: IC5.10 31.46,20.16 33.1,21.8 33.1,34.27 34.21,35.38 42.66,35.38 42.81,35.53 IC8.1
DO: length 61.8
  TOP w0.203: IC5.37 10.28,10 10.22,10.06 5.78,10.06 3.16,12.69 3.16,39.57 4.34,40.75 J20.1
  TOP w0.381: J20.1 15.93,41.84 16.06,41.97 16.06,48.77 15.18,49.65 J9.7
DTR: length 15.1
  TOP w0.254: 44.02,15.88 44.66,15.24 R2.2 ; 44.02,15.88 44.02,15.71 v1(43.74,15.42) ; 44.02,15.88 IC4.28 ; Q1.2 37.66,19.62 37.67,19.61 v1(38.87,19.61)
  BOTTOM w0.254: v1(43.74,15.42) 39.87,15.42 38.87,16.43 v1(38.87,19.61)
EXT_3V3: length 58.6
  TOP w0.254: IC4.6 46.05,20.39 v1(46.65,20.99) 44.97,20.99 IC4.7 ; IC8.2 43.71,34.28 v1(43.29,33.86) ; C5.2 C4.2 ; J9.4 v1(14.29,52.95)
  TOP w0.381: C6.2 17.63,52.89 17.57,52.95 v1(14.29,52.95)
  TOP w0.635: C13.2 80.85,32.8 C14.2 80.85,30.88 C15.2 ; v1(43.29,33.86) 44.05,33.86 44.94,32.98 R13.1 ; C2.2 32.4,10.25 v1(31.65,10.25) 30.9,10.25 30.65,10 IC5.2
  TOP w1.016: C14.2 79.72,32.8 79.65,32.73 v1(78.16,32.73) U1.4 U1.5 ; C5.2 v1(46.65,20.99)
  POWER_PLANE w0.203: VR2.1 37.07,86.09 ; VR2.1 34.92,86.09 ; VR2.1 35.99,85.01 ; VR2.1 35.99,87.16 ; J22.1 38.79,4.02 ; J22.1 39.66,3.16 ; J22.1 38.79,2.29 ; J22.1 37.93,3.16
  POWER_PLANE w1.016: v1(46.65,20.99) 45.35,20.99
  BOTTOM w0.635: VR2.1 34.58,86.09 v1(33.04,84.54)
  BOTTOM w1.016: J22.1 v1(38.79,6.25)
EXT_5V: length 28.1
  TOP w0.254: IC8.8 v1(47.72,37.73) 47.22,37.23 IC8.7
  TOP w0.635: IC6.1 v1(24.87,48.22)
  TOP w1.016: J8.14 v1(56.74,56.37)
  POWER_PLANE w0.203: J25.2 61.45,43.01 ; J25.2 60.41,41.97 ; J25.2 62.5,41.97 ; J25.2 61.45,40.93 ; J15.2 96.25,10.94 ; J15.2 96.25,8.86 ; J15.2 95.21,9.9 ; J15.2 97.29,9.9 ; S2.5 89.5,33.28 ; S2.5 89.5,30.14 ; S2.5 87.93,31.71 ; S2.5 91.07,31.71
  POWER_PLANE w0.635: 65.87,37.77 65.83,37.73
  BOTTOM w1.016: J25.2 v1(61.45,44.35)
INT_GOAL: length 44.2
  TOP w0.254: J23.1 43.83,5.78 42.13,7.48 27.06,7.48 25.17,9.37 25.17,27.29 25.66,27.78 IC5.16
IO0: length 28.7
  TOP w0.254: v1(14.64,25.24) 12.77,25.24 12.77,25.24 IC5.25 ; Q1.3 v1(33.11,18.67)
  BOTTOM w0.254: v1(33.11,18.67) 26.12,18.67 25.17,19.62 25.17,24.53 24.46,25.24 v1(14.64,25.24)
LRCLK: length 28.2
  TOP w0.254: IC5.11 31.35,21.43 32.47,22.54 32.47,35.65 34.05,37.23 41.83,37.23 41.83,37.23 IC8.14
ROW0: length 47.4
  TOP w0.381: J8.11 58.51,67.86 59.59,66.79 59.59,55.6 67.59,47.6 J5.8
ROW1: length 49.8
  TOP w0.381: J5.7 67.4,48.62 60.34,55.68 60.34,66.8 60.17,66.97 60.17,67.03 58.75,68.45 58.69,68.45 J8.10
ROW2: length 49.6
  TOP w0.381: J8.9 60.92,68.76 60.92,55.92 67.2,49.64 J5.6
ROW3: length 53
  TOP w0.381: J5.5 67.01,50.66 61.51,56.16 61.51,70.71 J8.8
ROW4: length 52.9
  TOP w0.381: J5.4 66.82,51.68 62.09,56.4 62.09,72.67 J8.7
ROW5: length 56.3
  TOP w0.381: J8.6 62.67,74.62 62.67,56.65 66.62,52.7 J5.3
ROW6: length 56.2
  TOP w0.381: J8.5 63.26,76.58 63.26,56.89 66.43,53.72 J5.2
ROW7: length 59.6
  TOP w0.381: J5.1 66.23,54.74 63.84,57.13 63.84,71.5 63.84,72.47 63.84,78.54 J8.4
ROW8: length 44.1
  TOP w0.381: J6.3 78.96,91.28 77.01,93.23 77.01,95.72 75.82,96.91 72.04,96.91 69.82,94.69 69.82,90.66 67.34,88.18 J8.3
ROW9: length 40.6
  TOP w0.381: J8.2 68.07,90.72 69.16,91.82 69.16,94.91 71.84,97.58 76.07,97.58 77.64,96.02 77.64,93.98 79.32,92.3 J6.2
ROW10: length 40.2
  TOP w0.381: J8.1 67.77,93.26 68.47,93.97 68.47,95.21 71.53,98.27 76.24,98.27 78.24,96.27 78.24,94.51 79.42,93.33 90.12,93.33 90.13,93.32 J6.1
ROW11: length 16
  TOP w0.381: J7.14 77.53,90.26 77.74,90.26 J6.4
ROW12: length 17.1
  TOP w0.381: J7.13 76.01,89.24 J6.5
ROW13: length 14.8
  TOP w0.381: J6.6 75.65,88.22 75.62,88.19 J7.12
ROW14: length 17.2
  TOP w0.381: J7.11 76.07,87.2 J6.7
ROW15: length 16
  TOP w0.381: J7.10 77.59,86.18 J6.8
RTS: length 9.1
  TOP w0.254: 39.32,14.75 39.64,15.07 41.71,15.07 42.02,15.39 IC4.24 ; 39.32,14.75 R3.1 ; 39.32,14.75 38.12,15.96 Q2.2
RXD: length 4.4
  TOP w0.254: IC4.25 42.52,14.65 41.15,13.28 R9.1
SCK: length 101.1
  TOP w0.254: R7.2 v1(5.19,24.8)
  TOP w0.635: J8.12 50.16,65.32 J21.1 47.48,66.78 47.39,66.87 v1(37.2,66.87)
  BOTTOM w0.254: v1(5.19,24.8) 5.19,27.86 5.98,28.65 35.22,28.65 37.2,30.62 v1(37.2,66.87)
SCLK: length 57
  TOP w0.203: IC5.30 10.28,18.89 9.27,19.9 9.27,34.57 11.48,36.78 20.08,36.78 21.01,37.71 21.01,39.71 20.97,39.75 J17.1
  TOP w0.254: IC6.9 33.75,54.21 v1(32.95,53.41) ; IC6.3 27.41,51.66 27.37,51.7 v1(27.37,52.74)
  TOP w0.381: IC6.3 27.41,47.76 27.42,47.75 27.42,47.2 J17.1
  BOTTOM w0.254: v1(27.37,52.74) 28.04,53.41 v1(32.95,53.41)
SCLK_IN: length 15
  TOP w0.203: J9.5 15.29,51.85 15.29,51.85 v1(15.83,51.85) ; v1(20.48,51.87) 25.92,51.87 26.13,51.67 IC6.2
  BOTTOM w0.203: v1(15.83,51.85) 19.93,51.85 19.95,51.87 v1(20.48,51.87)
SDA: length 93.7
  TOP w0.254: R6.2 v1(6.97,24.8)
  TOP w0.635: v1(37.91,61.49) 47.38,61.49 47.48,61.38 J19.1 50.1,62.78 J8.13
  BOTTOM w0.254: v1(6.97,24.8) 6.97,27.16 7.67,27.86 35.56,27.86 37.91,30.21 v1(37.91,61.49)
TXD: length 3.8
  TOP w0.254: R4.1 42.88,13.89 43.02,14.03 IC4.26
U0RX: length 34.4
  TOP w0.254: v1(13.59,13.81) 12.77,13.81 IC5.34 ; v1(32.79,13.8) 37.35,9.24 40.09,9.24 42.83,11.98 R4.2
  BOTTOM w0.254: v1(13.59,13.81) 31.79,13.81 31.8,13.8 v1(32.79,13.8)
U0TX: length 31.4
  TOP w0.254: R9.2 41.1,11.37 40.2,10.47 37.56,10.47 v1(35.5,12.54) ; v1(13.75,12.53) 12.77,12.53 12.77,12.54 IC5.35
  BOTTOM w0.254: v1(35.5,12.54) 34.92,12.54 v1(13.75,12.53)
VOL: length 69.1
  TOP w0.254: v1(31.43,30.55) 31.43,24.6 30.79,23.97 IC5.13
  BOTTOM w0.254: v1(31.43,30.55) 33.93,30.55 36.53,33.15 36.53,66.57 36.51,66.59 36.51,67.16 36.53,67.18 36.53,84.12 VR2.2
VUSB: length 5
  TOP w0.635: D4.1 v1(50.33,15.68)
  POWER_PLANE w0.203: J14.1 63.01,17.93 ; J14.1 63.82,17.12 ; J14.1 63.01,16.3 ; J14.1 62.19,17.12
N07818: length 4.5
  TOP w0.254: IC5.33 7.64,15.08 7.63,15.07 R6.1
N07830: length 9.6
  TOP w0.254: R7.1 5.19,12.17 6.1,11.27 IC5.36
N33314: length 14.8
  TOP w0.254: S2.2 97.68,28.36 LED1.2
N35850: length 13.9
  TOP w0.254: v1(46.26,22.3) 45.84,21.88 44.56,21.88 44.43,21.74 IC4.8 ; v1(46.44,15.22) R11.2 47.1,13.27 47.11,13.26 R10.2
  BOTTOM w0.254: v1(46.44,15.22) 45.61,16.05 45.61,21.65 v1(46.26,22.3)
N37546: length 4.3
  TOP w0.254: IC4.9 43.52,23.95 43.52,23.96 43.52,24.09 44.89,25.46 R13.2
N43223: length 10.7
  TOP w0.254: R14.2 34.14,58.01 33.13,57.01 32.99,57.01 32.49,56.5 IC6.10
N45229: length 65.7
  TOP w0.254: J11.2 22.78,80.54 24.13,79.2 24.13,64.04 27.83,60.34 43.37,60.34 44.19,59.52 44.19,39.13 44.21,39.11 IC8.10
N45231: length 73.7
  TOP w0.254: J11.1 24.63,84.25 24.63,64.34 28.17,60.8 38.19,60.8 38.23,60.84 43.54,60.84 44.71,59.67 IC8.9
N47844: length 7.6
  TOP w0.254: R3.2 39.02,11.98 v1(38.09,12.9) ; v1(38.09,17.67) 38.05,17.72 Q1.1
  BOTTOM w0.254: v1(38.09,12.9) v1(38.09,17.67)
N51590: length 13.4
  TOP w1.016: C10.2 67.47,35.48 67.49,35.46 U1.2 ; C10.2 C11.2 64.2,39.28 64.05,39.43 J25.1 ; C10.2 C12.2
N288090: length 5.6
  TOP w0.254: LED1.1 90.25,18.26 90.24,18.28 R1.2
N359501: length 12
  TOP w0.254: v1(36.84,12.66) 36.84,13.5 36.85,13.5 Q2.1 ; R2.1 v1(44.66,10.63)
  BOTTOM w0.254: v1(36.84,12.66) 36.84,11.72 37.92,10.63 v1(44.66,10.63)
N425301: length 3.7
  TOP w0.635: R14.1 42.16,55.92 42.19,55.89 LED3.2
N520181: length 5.4
  TOP w0.254: R15.1 76.33,24.71 76.32,24.72 U1.6

## Copper pours and planes (outline as drawn; the poured copper is in the pictures)
5VDD on POWER_PLANE: 61.41,13.58 64.8,13.58 69.87,18.66 96.38,18.81 96.38,29.19 94.96,29.12 83.75,28.79 54.21,28.77 54.35,19.1 64.41,19.04 64.39,15.87 64.27,15.75 61.48,15.75 61.41,15.68 61.41,13.59
5VIN on POWER_PLANE: 61.49,12.63 61.49,12.96 62.09,13.57 64.78,13.57 64.85,13.5 69.06,17.71 69.06,18.03 69.55,18.53 85.67,18.53 85.67,18.44 87.61,16.5 88.17,16.5 88.2,16.53 99.78,16.53 99.8,16.5 99.8,0.18 99.75,0.13 65.41,0.13 65.4,0.14 65.4,6.75 62.06,10.09 61.56,10.09 61.49,10.17 61.49,12.63
GND_POWER on GND_PLANE: 0.81,99.19 0.81,0.79 99.21,0.79 99.21,99.19
VBUS on POWER_PLANE: 48.07,12.3 52.72,12.43 58.94,6.21 58.94,5.27 58.85,5.17 52.8,5.17 47.71,10.38 47.69,12.3
EXT_3V3 on POWER_PLANE: 0.81,99.13 0.81,0.15 99.76,0.15 99.76,99.13
EXT_5V on POWER_PLANE: 99.55,4.49 92.27,4.62 77.35,29.25 77.35,30.05 79.43,32.14 79.43,32.61 79.42,34.33 79.42,36.01 77.73,35.99 77.32,35.97 70.82,35.97 70.43,35.41 24.31,35.39 24.43,49.44 24.65,49.67 44.08,49.67 51.74,57.33 51.74,57.44 80.66,57.44 81.8,56.3 81.8,43.07 81.79,43.06 99.6,42.78 99.6,33.98 99.86,29.2
VUSB on POWER_PLANE: 49.15,14.82 49.15,18.83 49.28,18.96 64.2,18.96 64.2,15.89 64.18,15.87 52.21,15.87 51.51,15.16 51.51,14.79 49.18,14.79

## Text on the board
XSECTION_CHART: *  SURFACE - AIR 0 MIL | L1: TOP CONDUCTOR - COPPER 1.2 MIL | *  DIELECTRIC - FR-4 8 MIL | L2: GND_PLANE CONDUCTOR - COPPER 1.2 MIL | L3: POWER_PLANE CONDUCTOR - COPPER 1.2 MIL | L4: BOTTOM CONDUCTOR - COPPER 1.2 MIL | DESIGN CROSS SECTION CHART | ___________________________ | TOTAL THICKNESS 28.8 MIL | 1-1 | 1-4
DIMENSION: FIGURE | SIZE | 13.0 | 29.53 | 33.46 | 40.16 | 45.28 | 47.24 | 52.3 | 73.0 | 120.08 | 123.0 | 131.1 | 140.16 | DRILL CHART: TOP to BOTTOM | ALL UNITS ARE IN MILS | PLATED | QTY | 66 | 24 | 2 | 1 | 37 | 3 | 8 | 6
PLACE_BOUND_TOP: FIGURE | SIZE | 43.31 | DRILL CHART: TOP to TOP | ALL UNITS ARE IN MILS | PLATED | QTY | 4
